# Altium PCB TM7705dayin.PcbDoc (part 2 of 2)
Units mm, origin at the board's own origin, x right, y up, seen from the top; angles counter-clockwise.
Board outline 80.01 x 33.4 mm, 2 copper layers (Top Layer, Bottom Layer); 118 components, 26 nets, 462 pads, 0 vias.
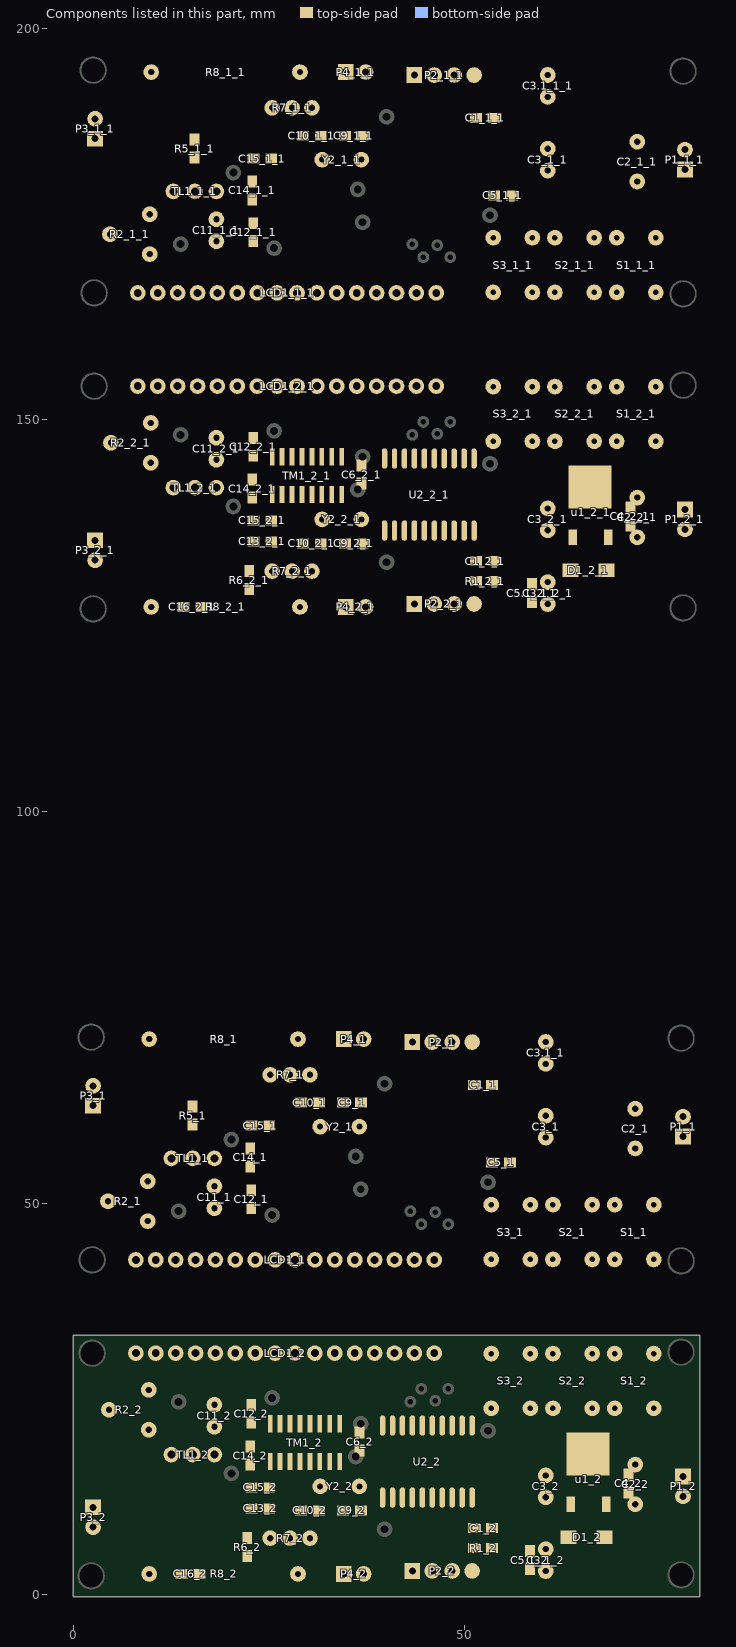
[diagram p2: the components of this part, seen from the top]

## Nets (pads, with @x,y where several pads share a name; then routed paths per layer and width w, separated by ;. In a path a pad name is that pad's centre, name@x,y a point inside that pad or via, vN(x,y) a via of type N, cw(c..) or ccw(c..) an arc to the next point about the centre after c; other vN are vias at no path point) (continued)
copper on no net: | length 3457.9
  Top Layer w0.7: 3.937,23.495 3.937,27.432 4.445,27.94 ; 4.191,146.939 4.191,150.876 4.699,151.384 ; 4.445,23.368 4.445,27.94 ; 4.699,146.812 4.699,151.384 ; 5.08,24.003 5.08,28.258 ; 5.334,147.447 5.334,151.701 ; 6.604,14.351 9.779,14.351 ; 6.858,137.795 10.033,137.795 ; 7.239,27.305 8.128,28.194 8.636,28.194 8.636,28.067 6.858,26.289 ; 7.493,150.749 8.382,151.638 8.89,151.638 8.89,151.511 7.112,149.733 ; 8.001,30.861 8.001,28.829 6.858,27.686 6.858,26.289 ; 8.255,154.305 8.255,152.273 7.112,151.13 7.112,149.733 ; 12.534,17.907 12.534,17.692 ; 12.788,141.351 12.788,141.136 ; 13.081,30.861 13.081,31.877 12.319,32.639 ; 13.335,154.305 13.335,155.321 12.573,156.083 ; 14.097,4.318 14.097,9.398 ; 14.351,127.762 14.351,132.842 ; 15.494,17.907 15.284,17.907 ; 15.621,42.759 15.621,44.537 17.526,46.442 30.734,46.442 33.274,48.982 43.053,48.982 ; 15.748,141.351 15.538,141.351 ; 15.875,166.203 15.875,167.981 17.78,169.886 30.988,169.886 33.528,172.426 43.307,172.426 ; 16.129,2.667 16.129,4.953 22.225,11.049 22.733,11.049 22.733,13.716 22.733,16.256 ; 16.383,126.111 16.383,128.397 22.479,134.493 22.987,134.493 22.987,137.16 22.987,139.7 ; 16.764,2.413 24.765,2.413 27.559,5.207 ; 17.018,125.857 25.019,125.857 27.813,128.651 ; 18.034,17.907 18.034,17.018 16.891,15.875 ; 18.034,21.463 18.542,21.971 ; 18.161,14.224 18.288,14.351 ; 18.161,27.686 18.161,28.194 ; 18.161,30.861 18.161,28.194 ; 18.288,141.351 18.288,140.462 17.145,139.319 ; 18.288,144.907 18.796,145.415 ; 18.415,16.891 17.399,15.875 ; 18.415,137.668 18.542,137.795 ; 18.415,151.13 18.415,151.638 ; 18.415,154.305 18.415,151.638 ; 18.669,140.335 17.653,139.319 ; 20.701,42.759 20.701,43.775 22.098,45.172 ; 20.955,45.172 22.098,45.172 ; 20.955,166.203 20.955,167.219 22.352,168.616 ; 21.209,168.616 22.352,168.616 ; 22.098,7.366 25.019,10.287 ; 22.352,130.81 25.273,133.731 ; 22.479,5.207 27.559,5.207 ; 22.733,128.651 27.813,128.651 ; 25.146,21.831 25.006,21.971 24.13,21.971 ; 25.273,13.335 26.416,14.478 ; 25.4,145.275 25.26,145.415 24.384,145.415 ; 25.527,136.779 26.67,137.922 ; 26.416,17.031 26.416,15.24 ; 26.67,140.475 26.67,138.684 ; 27.686,17.031 27.686,18.415 27.178,18.923 25.654,18.923 25.146,18.415 25.146,17.031 24.752,16.637 22.606,16.637 22.352,16.383 22.225,16.383 22.225,14.478 16.002,8.255 16.002,1.27 16.383,0.889 34.925,0.889 35.179,1.143 35.179,5.207 27.559,5.207 ; 27.94,140.475 27.94,141.859 27.432,142.367 25.908,142.367 25.4,141.859 25.4,140.475 25.006,140.081 22.86,140.081 22.606,139.827 22.479,139.827 22.479,137.922 16.256,131.699 16.256,124.714 16.637,124.333 35.179,124.333 35.433,124.587 35.433,128.651 27.813,128.651 ; 28.829,10.668 28.829,11.938 31.496,14.605 ; 28.956,17.031 28.956,18.669 29.718,19.431 31.623,19.431 32.766,20.574 32.766,21.831 32.766,23.368 33.274,23.876 34.671,23.876 ; 28.956,21.831 28.956,24.384 31.877,27.305 37.973,27.305 41.957,23.321 41.957,21.698 42.037,21.618 ; 28.996,10.882 29.083,10.795 29.464,11.176 29.464,11.811 31.496,13.843 31.536,13.843 ; 29.083,134.112 29.083,135.382 31.75,138.049 ; 29.21,140.475 29.21,142.113 29.972,142.875 31.877,142.875 33.02,144.018 33.02,145.275 33.02,146.812 33.528,147.32 34.925,147.32 ; 29.21,145.275 29.21,147.828 32.131,150.749 38.227,150.749 42.211,146.765 42.211,145.142 42.291,145.062 ; 29.25,134.326 29.337,134.239 29.718,134.62 29.718,135.255 31.75,137.287 31.79,137.287 ; 30.226,7.239 30.607,7.62 35.433,7.62 36.068,6.985 ; 30.226,17.031 30.226,15.113 27.432,12.319 27.432,9.906 28.194,9.144 32.385,9.144 ; 30.226,21.831 30.226,24.003 32.385,26.162 37.465,26.162 40.767,22.86 40.767,21.618 ; 30.353,6.477 35.941,6.477 ; 30.48,6.985 35.433,6.985 ; 30.48,130.683 30.861,131.064 35.687,131.064 36.322,130.429 ; 30.48,140.475 30.48,138.557 27.686,135.763 27.686,133.35 28.448,132.588 32.639,132.588 ; 30.48,145.275 30.48,147.447 32.639,149.606 37.719,149.606 41.021,146.304 41.021,145.062 ; 30.607,129.921 36.195,129.921 ; 30.734,130.429 35.687,130.429 ; 31.496,13.93 31.496,14.605 ; 31.496,15.24 31.496,14.605 ; 31.496,17.031 31.496,14.605 ; 31.496,21.831 31.496,23.749 32.766,25.019 36.322,25.019 39.497,21.844 39.497,21.618 ; 31.75,137.374 31.75,138.049 ; 31.75,138.684 31.75,138.049 ; 31.75,140.475 31.75,138.049 ; 31.75,145.275 31.75,147.193 33.02,148.463 36.576,148.463 39.751,145.288 39.751,145.062 ; 32.766,17.031 32.766,15.621 34.163,14.224 ; 33.02,140.475 33.02,139.065 34.417,137.668 ; 33.401,42.759 33.401,44.41 34.671,45.68 45.212,45.68 45.931,46.399 45.931,49.152 46.228,48.855 ; 33.655,166.203 33.655,167.854 34.925,169.124 45.466,169.124 46.185,169.843 46.185,172.596 46.482,172.299 ; 34.036,17.031 34.036,16.51 34.925,15.621 40.005,15.621 40.767,14.859 40.767,12.418 ; 34.036,20.701 34.036,20.32 ; 34.036,22.225 34.036,21.831 34.036,20.32 ; 34.29,140.475 34.29,139.954 35.179,139.065 40.259,139.065 41.021,138.303 41.021,135.862 ; 34.29,144.145 34.29,143.764 ; 34.29,145.669 34.29,145.275 34.29,143.764 ; 34.798,9.779 35.433,9.144 ; 35.052,133.223 35.687,132.588 ; 35.56,9.144 35.433,9.144 ; 35.814,132.588 35.687,132.588 ; 35.941,42.759 35.941,43.394 37.084,44.537 46.609,44.537 47.879,45.807 47.879,47.331 ; 36.155,13.462 34.925,13.462 34.544,13.843 ; 36.155,14.224 34.163,14.224 ; 36.195,166.203 36.195,166.838 37.338,167.981 46.863,167.981 48.133,169.251 48.133,170.775 ; 36.409,136.906 35.179,136.906 34.798,137.287 ; 36.409,137.668 34.417,137.668 ; 36.449,3.048 36.449,5.969 ; 36.449,10.795 36.703,10.795 36.703,13.676 ; 36.536,13.843 34.544,13.843 ; 36.576,20.701 36.068,20.701 35.814,20.955 35.814,22.733 34.671,23.876 ; 36.703,17.653 36.068,17.653 35.433,18.288 ; 36.703,21.844 36.703,22.098 ; 36.703,126.492 36.703,129.413 ; 36.703,134.239 36.957,134.239 36.957,137.12 ; 36.79,137.287 34.798,137.287 ; 36.83,18.796 35.56,18.796 34.036,20.32 ; 36.83,144.145 36.322,144.145 36.068,144.399 36.068,146.177 34.925,147.32 ; 36.957,2.413 36.957,5.461 36.449,5.969 ; 36.957,141.097 36.322,141.097 35.687,141.732 ; 36.957,145.288 36.957,145.542 ; 37.084,142.24 35.814,142.24 34.29,143.764 ; 37.211,125.857 37.211,128.905 36.703,129.413 ; 37.338,18.796 37.338,16.891 37.084,16.637 35.941,16.637 35.433,17.145 35.433,18.288 ; 37.592,2.921 37.592,5.461 36.068,6.985 ; 37.592,142.24 37.592,140.335 37.338,140.081 36.195,140.081 35.687,140.589 35.687,141.732 ; 37.846,126.365 37.846,128.905 36.322,130.429 ; 38.1,8.763 35.941,8.763 ; 38.354,132.207 36.195,132.207 ; 38.735,30.861 38.735,29.21 40.132,27.813 48.895,27.813 49.784,26.924 49.784,24.511 48.387,23.114 48.387,21.618 ; 38.989,154.305 38.989,152.654 40.386,151.257 49.149,151.257 50.038,150.368 50.038,147.955 48.641,146.558 48.641,145.062 ; 39.497,12.418 39.497,10.795 ; 39.751,135.862 39.751,134.239 ; 41.021,30.861 41.021,30.226 42.164,29.083 49.53,29.083 51.054,27.559 51.054,24.257 49.657,22.86 49.657,21.618 ; 41.275,154.305 41.275,153.67 42.418,152.527 49.784,152.527 51.308,151.003 51.308,147.701 49.911,146.304 49.911,145.062 ; 42.037,12.418 42.037,17.272 43.561,18.796 53.467,18.796 58.38,23.709 ; 42.291,135.862 42.291,140.716 43.815,142.24 53.721,142.24 58.634,147.153 ; 43.307,3.048 43.307,6.985 ; 43.307,12.418 43.307,16.002 44.577,17.272 54.991,17.272 61.254,23.535 ; 43.307,21.618 43.307,24.384 ; 43.561,42.759 43.561,42.378 44.989,40.95 ; 43.561,126.492 43.561,130.429 ; 43.561,135.862 43.561,139.446 44.831,140.716 55.245,140.716 61.508,146.979 ; 43.561,145.062 43.561,147.828 ; 43.815,166.203 43.815,165.822 45.243,164.394 ; 43.942,40.95 44.989,40.95 ; 44.196,164.394 45.243,164.394 ; 44.45,47.331 33.782,47.331 31.623,45.172 22.098,45.172 ; 44.577,12.418 44.577,14.605 45.72,15.748 56.515,15.748 63.627,22.86 63.627,24.257 65.786,26.416 69.977,26.416 ; 44.577,21.618 44.577,26.162 ; 44.704,170.775 34.036,170.775 31.877,168.616 22.352,168.616 ; 44.831,135.862 44.831,138.049 45.974,139.192 56.769,139.192 63.881,146.304 63.881,147.701 66.04,149.86 70.231,149.86 ; 44.831,145.062 44.831,149.606 ; 45.593,30.226 51.943,30.226 ; 45.847,21.618 45.847,24.384 ; 45.847,153.67 52.197,153.67 ; 46.101,30.861 51.308,30.861 ; 46.101,145.062 46.101,147.828 ; 46.355,154.305 51.562,154.305 ; 46.609,31.496 47.879,31.496 49.022,32.639 ; 46.609,32.639 49.022,32.639 ; 46.863,154.94 48.133,154.94 49.276,156.083 ; 46.863,156.083 49.276,156.083 ; 47.117,21.618 47.201,21.702 47.201,23.452 47.879,24.13 47.879,26.289 ; 47.371,145.062 47.455,145.146 47.455,146.896 48.133,147.574 48.133,149.733 ; 48.387,12.418 48.387,9.906 46.291,7.81 ; 48.641,135.862 48.641,133.35 46.545,131.255 ; 48.895,3.556 48.895,8.763 ; 49.149,127 49.149,132.207 ; 49.657,12.418 49.657,9.525 48.895,8.763 ; 49.911,135.862 49.911,132.969 49.149,132.207 ; 50.8,55.205 50.038,54.443 50.038,43.394 47.594,40.95 44.989,40.95 ; 50.927,12.418 50.927,6.223 51.181,5.969 ; 50.927,21.618 52.296,21.618 52.959,20.955 ; 51.054,178.649 50.292,177.887 50.292,166.838 47.848,164.394 45.243,164.394 ; 51.181,135.862 51.181,129.667 51.435,129.413 ; 51.181,145.062 52.55,145.062 53.213,144.399 ; 53.086,8.255 55.118,8.255 58.039,5.334 63.119,5.334 64.008,6.223 ; 53.34,131.699 55.372,131.699 58.293,128.778 63.373,128.778 64.262,129.667 ; 55.816,3.619 53.467,5.969 53.086,5.588 53.086,2.413 51.816,1.143 44.673,1.143 43.942,1.874 43.942,6.35 43.307,6.985 ; 56.07,127.063 53.721,129.413 53.34,129.032 53.34,125.857 52.07,124.587 44.927,124.587 44.196,125.318 44.196,129.794 43.561,130.429 ; 57.277,12.192 57.277,11.938 57.658,11.557 63.019,11.557 ; 57.531,7.366 59.817,7.366 63.232,10.781 ; 57.531,135.636 57.531,135.382 57.912,135.001 63.273,135.001 ; 57.785,130.81 60.071,130.81 63.486,134.225 ; 58.42,6.35 62.216,6.35 63.232,7.366 63.232,10.781 ; 58.674,129.794 62.47,129.794 63.486,130.81 63.486,134.225 ; 63.246,3.683 63.5,3.683 64.135,4.318 ; 63.5,127.127 63.754,127.127 64.389,127.762 ; 63.627,3.683 64.135,4.191 64.135,4.318 ; 63.881,127.127 64.389,127.635 64.389,127.762 ; 65.745,23.296 66.254,23.805 ; 65.999,146.74 66.508,147.249 ; 66.254,18.466 69.128,21.34 69.128,23.805 ; 66.254,30.805 66.254,32.472 ; 66.508,141.91 69.382,144.784 69.382,147.249 ; 66.508,154.249 66.508,155.916 ; 67.945,7.479 67.945,11.557 69.469,13.081 77.343,13.081 77.851,12.573 ; 68.199,130.923 68.199,135.001 69.723,136.525 77.597,136.525 78.105,136.017 ; 69.001,30.678 69.001,31.71 68.072,32.639 ; 69.128,30.805 69.652,30.805 72.517,27.94 ; 69.255,154.122 69.255,155.154 68.326,156.083 ; 69.382,154.249 69.906,154.249 72.771,151.384 ; 73.66,25.527 72.898,26.289 72.898,26.416 ; 73.914,25.273 74.128,25.059 74.128,24.551 ; 73.914,148.971 73.152,149.733 73.152,149.86 ; 74.128,23.805 74.128,24.551 ; 74.168,148.717 74.382,148.503 74.382,147.995 ; 74.382,147.249 74.382,147.995 ; 77.851,15.113 68.199,15.113 ; 78.105,138.557 68.453,138.557 ; 78.359,20.701 78.359,23.622 74.041,27.94 ; 78.613,144.145 78.613,147.066 74.295,151.384 ; 4.445,27.94 5.08,28.575 ; 4.445,27.94 4.445,27.813 4.889,28.258 5.08,28.258 ; 4.699,151.384 4.699,151.257 5.143,151.701 5.334,151.701 ; 4.699,151.384 5.334,152.019 ; 5.08,28.258 5.08,28.575 ; 5.08,28.575 5.588,29.083 5.588,32.004 6.223,32.639 12.319,32.639 ; 5.334,151.701 5.334,152.019 ; 5.334,152.019 5.842,152.527 5.842,155.448 6.477,156.083 12.573,156.083 ; 6.858,22.098 6.858,20.955 8.255,19.558 13.462,19.558 15.113,17.907 15.284,17.907 ; 6.858,22.098 7.683,22.924 ; 6.858,22.098 6.858,23.749 ; 6.858,23.749 6.858,24.511 ; 6.858,23.749 7.683,22.924 ; 6.858,24.511 6.858,26.289 ; 6.858,24.511 7.874,23.495 8.255,23.495 ; 7.112,145.542 7.112,147.193 ; 7.112,145.542 7.938,146.368 ; 7.112,145.542 7.112,144.399 8.509,143.002 13.716,143.002 15.367,141.351 15.538,141.351 ; 7.112,147.193 7.938,146.368 ; 7.112,147.193 7.112,147.955 ; 7.112,147.955 8.128,146.939 8.509,146.939 ; 7.112,147.955 7.112,149.733 ; 7.683,22.924 8.255,23.495 ; 7.938,146.368 8.509,146.939 ; 8.255,23.495 11.176,23.495 15.875,28.194 18.161,28.194 ; 8.509,146.939 11.43,146.939 16.129,151.638 18.415,151.638 ; 9.779,14.351 14.097,10.033 14.097,9.398 ; 9.779,14.351 18.288,14.351 ; 10.033,137.795 18.542,137.795 ; 10.033,137.795 14.351,133.477 14.351,132.842 ; 12.319,32.639 13.081,32.639 ; 12.534,17.692 12.534,17.057 13.716,15.875 14.351,15.875 ; 12.534,17.692 14.351,15.875 ; 12.573,156.083 13.335,156.083 ; 12.788,141.136 14.605,139.319 ; 12.788,141.136 12.788,140.501 13.97,139.319 14.605,139.319 ; 13.081,32.639 13.335,32.639 13.716,32.258 13.716,31.877 13.081,32.512 13.081,32.639 ; 13.335,156.083 13.335,155.956 13.97,155.321 13.97,155.702 13.589,156.083 13.335,156.083 ; 14.097,9.398 20.701,16.002 20.701,17.653 21.971,18.923 22.606,18.923 23.749,20.066 ; 14.351,15.875 16.129,15.875 ; 14.351,132.842 20.955,139.446 20.955,141.097 22.225,142.367 22.86,142.367 24.003,143.51 ; 14.605,139.319 16.383,139.319 ; 15.284,17.907 15.284,19.685 15.284,23.031 16.516,24.263 18.034,24.263 18.04,24.257 22.733,24.257 26.289,24.257 ; 15.538,141.351 15.538,143.129 15.538,146.475 16.77,147.707 18.288,147.707 18.294,147.701 22.987,147.701 26.543,147.701 ; 16.129,15.875 17.145,16.891 17.145,21.59 17.526,21.971 18.542,21.971 ; 16.129,15.875 16.891,15.875 ; 16.383,139.319 17.145,139.319 ; 16.383,139.319 17.399,140.335 17.399,145.034 17.78,145.415 18.796,145.415 ; 16.891,15.875 17.399,15.875 ; 17.145,139.319 17.653,139.319 ; 17.399,15.875 17.907,15.875 19.177,17.145 19.177,20.574 19.812,21.209 23.495,21.209 23.495,21.336 24.13,21.971 ; 17.653,139.319 18.161,139.319 19.431,140.589 19.431,144.018 20.066,144.653 23.749,144.653 23.749,144.78 24.384,145.415 ; 18.161,28.194 27.432,28.194 27.686,27.94 27.686,23.876 ; 18.288,14.351 20.574,16.637 20.574,19.304 21.336,20.066 23.749,20.066 ; 18.415,151.638 27.686,151.638 27.94,151.384 27.94,147.32 ; 18.542,21.971 22.733,21.971 24.13,21.971 ; 18.542,137.795 20.828,140.081 20.828,142.748 21.59,143.51 24.003,143.51 ; 18.796,145.415 22.987,145.415 24.384,145.415 ; 23.749,20.066 25.781,20.066 ; 24.003,143.51 26.035,143.51 ; 25.019,10.287 25.019,11.049 25.019,13.716 25.019,13.843 26.416,15.24 ; 25.019,10.287 25.019,9.144 23.114,7.239 25.146,7.239 27.686,7.239 27.686,8.001 25.654,10.033 25.654,13.716 26.416,14.478 ; 25.273,133.731 25.273,132.588 23.368,130.683 25.4,130.683 27.94,130.683 27.94,131.445 25.908,133.477 25.908,137.16 26.67,137.922 ; 25.273,133.731 25.273,134.493 25.273,137.16 25.273,137.287 26.67,138.684 ; 25.781,20.066 26.416,20.701 ; 25.781,20.066 27.051,20.066 ; 26.035,143.51 27.305,143.51 ; 26.035,143.51 26.67,144.145 ; 26.289,24.257 27.305,24.257 27.686,23.876 ; 26.289,24.257 26.416,24.13 26.416,21.831 26.416,20.701 ; 26.416,14.478 26.416,15.24 ; 26.416,20.701 27.051,20.066 ; 26.543,147.701 26.67,147.574 26.67,145.275 26.67,144.145 ; 26.543,147.701 27.559,147.701 27.94,147.32 ; 26.67,137.922 26.67,138.684 ; 26.67,144.145 27.305,143.51 ; 27.051,20.066 27.432,20.066 27.686,20.32 27.686,21.831 27.686,23.876 ; 27.305,143.51 27.686,143.51 27.94,143.764 27.94,145.275 27.94,147.32 ; 34.036,20.32 34.036,19.431 34.29,19.431 35.433,18.288 ; 34.163,14.224 34.544,13.843 ; 34.29,143.764 34.29,142.875 34.544,142.875 35.687,141.732 ; 34.417,137.668 34.798,137.287 ; 34.671,23.876 34.925,23.876 ; 34.925,9.144 34.417,9.652 34.417,10.795 31.369,10.795 31.369,9.779 32.385,8.763 35.306,8.763 ; 34.925,9.144 35.306,8.763 ; 34.925,9.144 35.433,9.144 ; 34.925,23.876 36.703,22.098 ; 34.925,23.876 35.433,23.876 36.703,22.606 36.703,22.098 ; 34.925,147.32 35.179,147.32 ; 35.179,132.588 35.687,132.588 ; 35.179,132.588 35.56,132.207 ; 35.179,132.588 34.671,133.096 34.671,134.239 31.623,134.239 31.623,133.223 32.639,132.207 35.56,132.207 ; 35.179,147.32 35.687,147.32 36.957,146.05 36.957,145.542 ; 35.179,147.32 36.957,145.542 ; 35.306,8.763 35.941,8.763 ; 35.433,6.985 36.068,6.985 ; 35.433,6.985 35.941,6.477 ; 35.433,9.144 36.322,9.144 ; 35.56,132.207 36.195,132.207 ; 35.687,130.429 36.195,129.921 ; 35.687,130.429 36.322,130.429 ; 35.687,132.588 36.576,132.588 ; 35.941,6.477 36.449,5.969 ; 35.941,8.763 39.243,5.461 39.243,1.27 39.782,0.731 64.358,0.731 65.977,2.349 65.977,12.89 ; 35.941,8.763 36.322,9.144 ; 36.195,129.921 36.703,129.413 ; 36.195,132.207 36.576,132.588 ; 36.195,132.207 39.497,128.905 39.497,124.714 40.036,124.175 64.612,124.175 66.23,125.793 66.23,136.334 ; 36.322,9.144 38.481,9.144 39.497,10.16 39.497,10.795 ; 36.576,132.588 38.735,132.588 39.751,133.604 39.751,134.239 ; 39.497,10.795 43.307,6.985 ; 39.751,134.239 43.561,130.429 ; 45.847,3.048 45.847,7.366 ; 45.847,3.048 46.291,3.492 46.291,7.81 ; 45.847,3.048 45.339,3.556 45.339,6.858 45.847,7.366 ; 45.847,7.366 46.291,7.81 ; 46.101,126.492 45.593,127 45.593,130.302 46.101,130.81 ; 46.101,126.492 46.545,126.936 46.545,131.255 ; 46.101,126.492 46.101,130.81 ; 46.101,130.81 46.545,131.255 ; 48.387,8.255 48.387,3.048 47.879,3.556 47.879,7.747 48.387,8.255 ; 48.387,8.255 48.895,8.763 ; 48.641,131.699 48.133,131.191 48.133,127 48.641,126.492 48.641,131.699 ; 48.641,131.699 49.149,132.207 ; 49.022,32.639 54.864,32.639 ; 49.276,156.083 55.118,156.083 ; 51.308,30.861 53.324,30.861 53.38,30.805 53.38,31.155 54.864,32.639 ; 51.308,30.861 51.943,30.226 ; 51.562,154.305 52.197,153.67 ; 51.562,154.305 53.578,154.305 53.634,154.249 53.634,154.599 55.118,156.083 ; 51.943,30.226 52.705,29.464 54.483,29.464 57.658,32.639 ; 52.197,153.67 52.959,152.908 54.737,152.908 57.912,156.083 ; 54.864,32.639 57.658,32.639 ; 55.118,156.083 57.912,156.083 ; 57.658,32.639 62.738,32.639 ; 57.912,156.083 62.992,156.083 ; 61.622,12.954 63.5,12.954 64.008,12.446 64.008,6.223 ; 61.622,12.954 63.019,11.557 ; 61.622,12.954 56.388,12.954 53.467,10.033 53.467,8.509 55.626,8.509 57.912,6.223 64.008,6.223 ; 61.876,136.398 56.642,136.398 53.721,133.477 53.721,131.953 55.88,131.953 58.166,129.667 64.262,129.667 ; 61.876,136.398 63.273,135.001 ; 61.876,136.398 63.754,136.398 64.262,135.89 64.262,129.667 ; 62.738,32.639 68.072,32.639 ; 62.738,32.639 67.437,27.94 72.517,27.94 ; 62.992,156.083 67.691,151.384 72.771,151.384 ; 62.992,156.083 68.326,156.083 ; 63.019,11.557 63.445,11.557 63.445,10.994 63.232,10.781 ; 63.019,11.557 63.232,11.344 63.232,10.781 ; 63.273,135.001 63.486,134.788 63.486,134.225 ; 63.273,135.001 63.699,135.001 63.699,134.438 63.486,134.225 ; 64.135,4.318 65.151,5.334 65.151,12.065 ; 64.389,127.762 65.405,128.778 65.405,135.509 ; 65.151,12.065 65.405,12.319 ; 65.151,12.065 65.151,13.081 ; 65.151,13.081 65.151,15.113 ; 65.151,13.081 63.119,15.113 65.151,15.113 ; 65.151,13.081 65.405,12.827 65.405,12.319 ; 65.151,15.113 68.199,15.113 ; 65.405,12.319 65.977,12.89 ; 65.405,135.509 65.405,136.525 ; 65.405,135.509 65.659,135.763 ; 65.405,136.525 65.659,136.271 65.659,135.763 ; 65.405,136.525 63.373,138.557 65.405,138.557 ; 65.405,136.525 65.405,138.557 ; 65.405,138.557 68.453,138.557 ; 65.659,135.763 66.23,136.334 ; 65.977,12.89 68.199,15.113 ; 66.23,136.334 68.453,138.557 ; 68.072,32.639 69.342,32.639 74.041,27.94 ; 68.326,156.083 69.596,156.083 74.295,151.384 ; 69.977,26.416 72.263,26.416 ; 69.977,26.416 73.66,22.733 75.311,22.733 75.692,23.114 75.692,24.003 73.279,26.416 72.898,26.416 ; 70.231,149.86 73.914,146.177 75.565,146.177 75.946,146.558 75.946,147.447 73.533,149.86 73.152,149.86 ; 70.231,149.86 72.517,149.86 ; 72.263,26.416 74.128,24.551 ; 72.263,26.416 72.898,26.416 ; 72.517,27.94 74.041,27.94 ; 72.517,149.86 73.152,149.86 ; 72.517,149.86 74.382,147.995 ; 72.771,151.384 74.295,151.384
  Top Layer w1.5: 10.541,42.759 10.541,46.696 9.525,47.712 7.112,50.125 7.112,56.602 ; 10.795,166.203 10.795,170.14 9.779,171.156 7.366,173.569 7.366,180.046 ; 12.534,55.713 12.534,57.833 14.732,60.031 15.24,60.031 16.002,60.031 18.034,57.999 18.034,55.713 18.034,52.157 ; 12.788,179.157 12.788,181.277 14.986,183.475 15.494,183.475 16.256,183.475 18.288,181.443 18.288,179.157 18.288,175.601 ; 19.431,64.857 21.78,67.207 ; 19.685,188.301 22.034,190.651 ; 21.082,66.381 17.018,62.317 ; 21.336,189.825 17.272,185.761 ; 60.325,67.778 57.912,67.778 ; 60.579,191.222 58.166,191.222 ; 7.112,56.602 7.112,57.999 ; 7.112,56.602 12.827,62.317 ; 7.112,57.999 7.112,59.396 ; 7.112,57.999 11.43,62.317 12.827,62.317 ; 7.112,59.396 7.112,62.444 13.208,68.54 21.463,68.54 ; 7.112,59.396 11.303,63.587 16.51,63.587 ; 7.366,180.046 13.081,185.761 ; 7.366,180.046 7.366,181.443 ; 7.366,181.443 11.684,185.761 13.081,185.761 ; 7.366,181.443 7.366,182.84 ; 7.366,182.84 11.557,187.031 16.764,187.031 ; 7.366,182.84 7.366,185.888 13.462,191.984 21.717,191.984 ; 12.827,62.317 15.24,62.317 ; 13.081,185.761 15.494,185.761 ; 15.24,62.317 17.018,62.317 ; 15.24,62.317 16.51,63.587 ; 15.494,185.761 16.764,187.031 ; 15.494,185.761 17.272,185.761 ; 16.51,63.587 21.463,68.54 ; 16.764,187.031 21.717,191.984 ; 17.018,62.317 19.05,62.317 21.78,65.048 21.78,67.207 ; 17.272,185.761 19.304,185.761 22.034,188.492 22.034,190.651 ; 21.463,68.54 23.114,68.54 ; 21.717,191.984 23.368,191.984 ; 21.78,67.207 23.114,68.54 ; 22.034,190.651 23.368,191.984 ; 23.114,68.54 32.766,68.54 ; 23.368,191.984 33.02,191.984 ; 32.766,68.54 57.15,68.54 57.912,67.778 ; 32.766,68.54 33.528,67.778 57.912,67.778 ; 33.02,191.984 33.782,191.222 58.166,191.222 ; 33.02,191.984 57.404,191.984 58.166,191.222
  Top Layer w2: 15.284,48.43 15.284,51.141 ; 15.284,55.713 15.284,54.189 ; 15.538,171.874 15.538,174.585 ; 15.538,179.157 15.538,177.633 ; 24.32,60.793 25.59,62.063 ; 24.575,184.237 25.845,185.507 ; 27.432,51.268 28.194,52.03 ; 27.686,174.712 28.448,175.474 ; 36.703,51.776 47.498,51.776 52.959,57.237 ; 36.957,175.22 47.752,175.22 53.213,180.681 ; 40.386,61.047 39.243,61.047 ; 40.64,184.491 39.497,184.491 ; 52.959,52.665 52.959,57.237 ; 53.213,176.109 53.213,180.681 ; 60.325,61.174 56.896,61.174 52.959,57.237 ; 60.579,184.618 57.15,184.618 53.213,180.681 ; 61.722,17.018 64.806,17.018 63.536,15.748 60.827,15.748 60.325,15.246 60.325,16.256 66.254,22.185 66.254,23.805 69.128,23.805 72.486,20.447 73.279,20.447 ; 61.976,140.462 65.06,140.462 63.79,139.192 61.081,139.192 60.579,138.69 60.579,139.7 66.508,145.629 66.508,147.249 69.382,147.249 72.74,143.891 73.533,143.891 ; 63.016,54.848 62.531,55.332 ; 63.27,178.292 62.785,178.776 ; 15.284,51.141 15.284,54.189 ; 15.284,51.141 17.068,49.357 18.034,49.357 19.171,49.357 20.955,51.141 20.955,59.777 24.956,63.778 27.305,63.778 ; 15.284,54.189 14.014,52.919 9.652,52.919 9.525,52.792 9.525,52.538 13.716,48.347 22.86,48.347 ; 15.538,174.585 17.322,172.801 18.288,172.801 19.425,172.801 21.209,174.585 21.209,183.221 25.209,187.222 27.559,187.222 ; 15.538,174.585 15.538,177.633 ; 15.538,177.633 14.268,176.363 9.906,176.363 9.779,176.236 9.779,175.982 13.97,171.791 23.114,171.791 ; 22.86,48.347 27.051,48.347 ; 22.86,48.347 25.59,51.078 25.59,62.063 ; 23.114,171.791 25.845,174.522 25.845,185.507 ; 23.114,171.791 27.305,171.791 ; 25.59,62.063 27.305,63.778 ; 25.845,185.507 27.559,187.222 ; 27.051,48.347 29.21,48.347 32.131,51.268 ; 27.051,48.347 29.972,51.268 31.242,51.268 ; 27.305,63.778 32.131,63.778 ; 27.305,171.791 30.226,174.712 31.496,174.712 ; 27.305,171.791 29.464,171.791 32.385,174.712 ; 27.559,187.222 32.385,187.222 ; 28.194,52.03 29.337,52.03 34.163,56.856 ; 28.194,52.03 28.194,58.253 ; 28.194,58.253 28.194,61.047 29.591,62.444 37.846,62.444 ; 28.194,58.253 29.591,56.856 34.163,56.856 ; 28.448,175.474 28.448,181.697 ; 28.448,175.474 29.591,175.474 34.417,180.3 ; 28.448,181.697 29.845,180.3 34.417,180.3 ; 28.448,181.697 28.448,184.491 29.845,185.888 38.1,185.888 ; 31.242,51.268 32.131,51.268 ; 31.242,51.268 35.242,55.269 ; 31.496,174.712 35.496,178.713 ; 31.496,174.712 32.385,174.712 ; 32.131,51.268 35.687,54.824 45.974,54.824 54.927,63.778 ; 32.131,63.778 43.116,63.778 ; 32.131,63.778 33.846,65.492 53.975,65.492 ; 32.385,174.712 35.941,178.268 46.228,178.268 55.181,187.222 ; 32.385,187.222 34.099,188.936 54.229,188.936 ; 32.385,187.222 43.37,187.222 ; 34.163,56.856 36.83,56.856 ; 34.417,180.3 37.084,180.3 ; 35.242,55.269 36.83,56.856 ; 35.242,55.269 35.623,54.888 37.592,56.856 ; 35.496,178.713 35.877,178.332 37.846,180.3 ; 35.496,178.713 37.084,180.3 ; 36.83,56.856 37.592,56.856 ; 37.084,180.3 37.846,180.3 ; 37.592,56.856 39.243,58.507 ; 37.846,62.444 41.783,62.444 43.116,63.778 ; 37.846,62.444 39.243,61.047 ; 37.846,180.3 39.497,181.951 ; 38.1,185.888 39.497,184.491 ; 38.1,185.888 42.037,185.888 43.37,187.222 ; 39.243,58.507 44.514,63.778 ; 39.243,58.507 39.243,61.047 ; 39.497,181.951 39.497,184.491 ; 39.497,181.951 44.767,187.222 ; 43.116,63.778 44.514,63.778 ; 43.37,187.222 44.767,187.222 ; 44.514,63.778 54.927,63.778 ; 44.767,187.222 55.181,187.222 ; 53.975,65.492 62.611,65.492 ; 53.975,65.492 55.689,63.778 ; 54.229,188.936 55.944,187.222 ; 54.229,188.936 62.865,188.936 ; 54.927,63.778 55.689,63.778 ; 55.181,187.222 55.944,187.222 ; 55.689,63.778 61.658,63.778 ; 55.944,187.222 61.912,187.222 ; 56.896,56.475 58.795,58.374 60.325,58.374 ; 56.896,56.475 55.753,55.332 62.531,55.332 ; 56.896,56.475 59.262,56.475 60.325,57.538 ; 57.15,179.919 59.516,179.919 60.579,180.982 ; 57.15,179.919 56.007,178.776 62.785,178.776 ; 57.15,179.919 59.049,181.818 60.579,181.818 ; 60.325,57.538 62.531,55.332 ; 60.325,57.538 60.325,58.374 ; 60.325,58.374 61.843,58.374 ; 60.579,180.982 60.579,181.818 ; 60.579,180.982 62.785,178.776 ; 60.579,181.818 62.097,181.818 ; 61.658,63.778 65.278,63.778 ; 61.658,63.778 63.119,62.317 63.119,59.65 61.843,58.374 ; 61.843,58.374 62.859,58.374 65.278,60.793 ; 61.912,187.222 63.373,185.761 63.373,183.094 62.097,181.818 ; 61.912,187.222 65.532,187.222 ; 62.097,181.818 63.113,181.818 65.532,184.237 ; 62.531,55.332 66.254,51.609 66.254,49.815 69.032,49.815 72.517,53.3 77.597,53.3 77.978,53.681 77.978,57.872 67.818,57.872 65.278,60.412 65.278,60.793 ; 62.605,70.578 63.24,70.578 65.278,68.54 ; 62.605,70.578 63.627,69.556 63.627,66.508 62.611,65.492 ; 62.605,70.578 60.325,70.578 60.325,72.08 60.468,72.223 64.135,72.223 65.278,71.08 65.278,68.54 ; 62.611,65.492 65.151,65.492 65.278,65.365 ; 62.785,178.776 66.508,175.053 66.508,173.259 69.286,173.259 72.771,176.744 77.851,176.744 78.232,177.125 78.232,181.316 68.072,181.316 65.532,183.856 65.532,184.237 ; 62.859,194.022 60.579,194.022 60.579,195.524 60.722,195.667 64.389,195.667 65.532,194.524 65.532,191.984 ; 62.859,194.022 63.881,193 63.881,189.952 62.865,188.936 ; 62.859,194.022 63.494,194.022 65.532,191.984 ; 62.865,188.936 65.405,188.936 65.532,188.809 ; 65.278,60.793 65.278,63.778 ; 65.278,63.778 65.278,65.365 ; 65.278,65.365 65.278,68.54 ; 65.532,184.237 65.532,187.222 ; 65.532,187.222 65.532,188.809 ; 65.532,188.809 65.532,191.984

## Keep-outs
Keep-Out Layer:
  lines w0.254: 0,0 80.01,0 80.01,33.401 0,33.401 0,0 ; 0,40.219 80.01,40.219 80.01,73.62 0,73.62 0,40.219 ; 0.254,123.444 0.254,156.845 80.264,156.845 80.264,123.444 0.254,123.444 ; 0.254,163.663 0.254,197.064 80.264,197.064 80.264,163.663 0.254,163.663

## Other copper
Top Layer:
  rectangle: 9.525,64.095 11.557,66
  rectangle: 8.128,62.444 10.541,64.349
  rectangle: 7.239,60.666 10.16,62.698
  rectangle: 10.414,63.841 12.573,67.016
  rectangle: 12.319,63.968 20.066,68.286
  rectangle: 45.72,55.84 47.752,57.745
  rectangle: 45.847,57.364 49.276,58.888
  rectangle: 50.038,60.412 51.562,61.555
  rectangle: 50.165,61.174 53.34,63.079
  rectangle: 45.847,58.634 50.419,62.952
  rectangle: 39.497,57.491 41.783,59.777
  rectangle: 37.846,55.586 41.402,57.745
  rectangle: 41.021,55.586 46.101,63.333
  rectangle: 25.019,48.855 28.067,51.522
  rectangle: 9.525,41.616 11.557,45.68
  rectangle: 42.545,40.6 44.577,43.902
  rectangle: 34.925,40.6 36.957,44.791
  rectangle: 32.385,40.6 34.417,44.791
  rectangle: 19.685,40.6 21.717,45.553
  rectangle: 14.605,40.6 16.637,45.68
  rectangle: 28.321,52.665 33.02,56.602
  rectangle: 66.294,50.379 70.612,52.792
  rectangle: 64.897,52.411 72.136,54.189
  rectangle: 63.246,53.935 77.724,55.586
  rectangle: 61.214,55.332 78.105,57.872
  rectangle: 63.5,56.856 66.675,59.65
  rectangle: 62.865,60.031 65.151,63.206
  rectangle: 11.43,49.236 14.478,52.284
  rectangle: 26.162,60.539 29.21,62.952
  rectangle: 21.971,51.522 28.067,60.92
  rectangle: 20.193,48.855 25.59,59.904
  rectangle: 49.911,69.048 51.943,70.572
  rectangle: 69.342,12.319 77.724,12.954
  rectangle: 32.131,8.89 34.798,9.525
  rectangle: 31.496,9.398 35.052,10.541
  rectangle: 15.748,24.13 27.686,28.194
  rectangle: 8.128,19.685 15.284,23.368
  rectangle: 6.858,20.447 8.382,22.479
  rectangle: 7.493,22.225 8.509,23.114
  rectangle: 7.62,19.685 8.636,20.574
  rectangle: 14.351,18.415 15.113,19.812
  rectangle: 13.716,18.923 14.732,19.812
  rectangle: 11.303,23.241 15.748,23.876
  rectangle: 13.462,23.647 15.9,26.035
  rectangle: 15.24,25.654 16.002,27.686
  rectangle: 14.478,25.781 15.367,27.051
  rectangle: 13.97,25.781 14.478,26.416
  rectangle: 12.7,23.749 13.716,25.4
  rectangle: 11.938,23.749 12.7,24.638
  rectangle: 17.335,16.764 19.304,21.78
  rectangle: 18.542,21.209 22.86,21.971
  rectangle: 4.953,0.762 14.478,8.001
  rectangle: 27.559,0.762 35.306,5.461
  rectangle: 0.635,5.08 8.763,14.732
  rectangle: 8.509,7.366 13.843,10.16
  rectangle: 8.509,10.16 11.684,12.446
  rectangle: 8.509,12.319 10.287,14.097
  rectangle: 10.16,12.192 11.303,13.335
  rectangle: 11.557,10.033 12.446,12.065
  rectangle: 12.446,10.033 13.716,10.795
  rectangle: 12.192,10.668 13.208,11.303
  rectangle: 10.287,10.033 14.605,14.351
  rectangle: 14.351,11.811 16.764,14.224
  rectangle: 16.51,13.208 18.161,14.224
  rectangle: 16.51,12.446 17.526,13.208
  rectangle: 14.605,10.287 15.494,11.811
  rectangle: 15.24,11.049 16.129,11.938
  rectangle: 20.701,18.161 23.114,19.431
  rectangle: 20.955,18.923 23.368,19.939
  rectangle: 22.987,16.002 25.273,17.399
  rectangle: 21.844,12.827 23.495,17.399
  rectangle: 16.002,2.413 18.542,8.255
  rectangle: 16.256,6.223 18.542,8.763
  rectangle: 16.764,8.001 19.558,9.271
  rectangle: 19.304,9.906 21.082,11.684
  rectangle: 21.463,10.414 23.495,13.716
  rectangle: 20.193,10.414 22.098,12.7
  rectangle: 20.955,12.319 21.717,13.335
  rectangle: 19.685,11.049 20.574,12.065
  rectangle: 18.288,9.017 20.701,10.922
  rectangle: 17.526,8.763 18.923,10.16
  rectangle: 17.145,9.017 18.034,9.525
  rectangle: 19.113,10.287 20.066,11.367
  rectangle: 22.352,6.604 27.559,8.255
  rectangle: 23.241,8.255 27.178,8.763
  rectangle: 23.495,8.636 26.924,9.017
  rectangle: 24.003,8.89 26.416,9.525
  rectangle: 24.511,9.144 26.162,10.033
  rectangle: 26.797,1.143 27.813,4.699
  rectangle: 26.035,1.143 26.797,4.064
  rectangle: 25.4,2.032 26.162,3.429
  rectangle: 16.002,1.016 26.67,2.54
  rectangle: 16.129,2.667 17.907,4.826
  rectangle: 19.304,8.636 19.812,9.271
  rectangle: 18.415,7.62 18.796,8.255
  rectangle: 21.59,4.191 26.924,5.08
  rectangle: 57.468,11.747 63.627,12.827
  rectangle: 63.232,7.366 63.881,10.781
  rectangle: 58.039,6.477 63.119,7.366
  rectangle: 60.452,6.985 63.373,8.255
  rectangle: 61.087,7.747 63.881,9.144
  rectangle: 61.849,8.89 63.627,9.779
  rectangle: 62.484,9.525 63.246,10.287
  rectangle: 41.052,0.731 43.307,6.985
  rectangle: 42.926,0.731 44.45,2.413
  rectangle: 39.243,2.54 43.053,7.493
  rectangle: 39.624,1.778 41.275,2.794
  rectangle: 40.386,1.016 41.529,1.905
  rectangle: 38.1,6.35 41.402,9.017
  rectangle: 41.148,7.239 42.164,8.509
  rectangle: 41.91,7.239 42.418,7.874
  rectangle: 38.862,5.715 39.624,6.477
  rectangle: 36.703,7.62 38.354,8.509
  rectangle: 37.465,6.985 38.354,7.747
  rectangle: 39.116,8.636 40.386,10.16
  rectangle: 40.259,8.763 40.894,9.398
  rectangle: 38.798,8.763 39.497,9.461
  rectangle: 52.832,1.016 64.77,3.937
  rectangle: 52.197,0.762 53.213,1.651
  rectangle: 53.213,4.191 54.356,5.461
  rectangle: 54.229,3.937 54.864,4.699
  rectangle: 64.516,1.524 65.659,2.667
  rectangle: 64.389,2.54 65.977,4.572
  rectangle: 64.643,4.318 65.977,5.08
  rectangle: 65.024,4.953 66.294,14.859
  rectangle: 66.294,13.335 66.802,14.859
  rectangle: 66.802,14.097 67.437,14.859
  rectangle: 63.881,13.97 64.897,14.859
  rectangle: 64.643,13.716 64.897,13.97
  rectangle: 68.072,6.35 78.867,12.573
  rectangle: 66.167,14.986 78.867,21.59
  rectangle: 66.294,20.828 70.358,22.987
  rectangle: 59.436,14.605 64.389,16.129
  rectangle: 57.531,5.334 63.119,7.366
  rectangle: 18.034,2.286 26.416,4.064
  rectangle: 53.213,3.81 55.372,4.445
  rectangle: 56.388,7.366 63.119,12.7
  rectangle: 53.594,8.128 56.769,10.16
  rectangle: 53.848,9.906 56.642,10.668
  rectangle: 54.356,10.668 56.642,11.303
  rectangle: 55.245,11.303 56.642,12.065
  rectangle: 55.753,11.811 57.023,12.573
  rectangle: 36.576,16.891 37.338,17.399
  rectangle: 22.225,29.337 24.257,33.02
  rectangle: 24.765,29.337 26.797,33.02
  rectangle: 27.305,29.337 29.337,33.02
  rectangle: 29.845,29.337 31.877,33.02
  rectangle: 37.465,29.337 39.497,33.02
  rectangle: 40.132,29.337 42.164,33.02
  rectangle: 45.085,29.845 47.117,33.02
  rectangle: 12.065,27.94 14.097,33.02
  rectangle: 6.985,27.94 9.017,32.004
  rectangle: 17.145,28.194 19.177,33.02
  rectangle: 67.056,27.94 73.279,29.21
  rectangle: 66.548,28.702 69.596,32.512
  rectangle: 69.469,29.083 72.39,29.845
  rectangle: 69.469,29.591 72.009,30.353
  rectangle: 69.215,30.226 71.374,30.861
  rectangle: 69.342,30.734 70.358,32.004
  rectangle: 70.104,30.734 70.866,31.242
  rectangle: 63.5,31.496 66.294,32.385
  rectangle: 64.262,30.861 66.802,31.496
  rectangle: 64.897,30.226 66.421,30.988
  rectangle: 66.04,28.956 67.183,30.099
  rectangle: 46.609,30.099 55.118,32.639
  rectangle: 52.451,29.591 54.737,30.226
  rectangle: 54.991,30.48 56.007,32.385
  rectangle: 55.753,31.242 56.642,32.385
  rectangle: 56.642,31.75 57.023,32.385
  rectangle: 36.068,0.508 37.973,3.81
  rectangle: 35.941,10.795 37.465,13.716
  rectangle: 73.025,22.924 75.501,24.511
  rectangle: 70.739,25.4 72.517,26.289
  rectangle: 71.374,24.765 73.66,25.527
  rectangle: 72.009,23.805 74.128,24.892
  rectangle: 72.136,24.892 74.128,25.908
  rectangle: 39.243,1.143 40.767,2.667
  rectangle: 39.624,0.762 40.767,1.27
  rectangle: 39.878,124.206 41.021,124.714
  rectangle: 39.497,124.587 41.021,126.111
  rectangle: 72.39,148.336 74.382,149.352
  rectangle: 72.263,147.249 74.382,148.336
  rectangle: 71.628,148.209 73.914,148.971
  rectangle: 70.993,148.844 72.771,149.733
  rectangle: 73.279,146.368 75.755,147.955
  rectangle: 36.195,134.239 37.719,137.16
  rectangle: 36.322,123.952 38.227,127.254
  rectangle: 56.896,155.194 57.277,155.829
  rectangle: 56.007,154.686 56.896,155.829
  rectangle: 55.245,153.924 56.261,155.829
  rectangle: 52.705,153.035 54.991,153.67
  rectangle: 46.863,153.543 55.372,156.083
  rectangle: 66.294,152.4 67.437,153.543
  rectangle: 65.151,153.67 66.675,154.432
  rectangle: 64.516,154.305 67.056,154.94
  rectangle: 63.754,154.94 66.548,155.829
  rectangle: 70.358,154.178 71.12,154.686
  rectangle: 69.596,154.178 70.612,155.448
  rectangle: 69.469,153.67 71.628,154.305
  rectangle: 69.723,153.035 72.263,153.797
  rectangle: 69.723,152.527 72.644,153.289
  rectangle: 66.802,152.146 69.85,155.956
  rectangle: 67.31,151.384 73.533,152.654
  rectangle: 17.399,151.638 19.431,156.464
  rectangle: 7.239,151.384 9.271,155.448
  rectangle: 12.319,151.384 14.351,156.464
  rectangle: 45.339,153.289 47.371,156.464
  rectangle: 40.386,152.781 42.418,156.464
  rectangle: 37.719,152.781 39.751,156.464
  rectangle: 30.099,152.781 32.131,156.464
  rectangle: 27.559,152.781 29.591,156.464
  rectangle: 25.019,152.781 27.051,156.464
  rectangle: 22.479,152.781 24.511,156.464
  rectangle: 36.83,140.335 37.592,140.843
  rectangle: 56.007,135.255 57.277,136.017
  rectangle: 55.499,134.747 56.896,135.509
  rectangle: 54.61,134.112 56.896,134.747
  rectangle: 54.102,133.35 56.896,134.112
  rectangle: 53.848,131.572 57.023,133.604
  rectangle: 56.642,130.81 63.373,136.144
  rectangle: 53.467,127.254 55.626,127.889
  rectangle: 18.288,125.73 26.67,127.508
  rectangle: 57.785,128.778 63.373,130.81
  rectangle: 59.69,138.049 64.643,139.573
  rectangle: 66.548,144.272 70.612,146.431
  rectangle: 66.421,138.43 79.121,145.034
  rectangle: 68.326,129.794 79.121,136.017
  rectangle: 64.897,137.16 65.151,137.414
  rectangle: 64.135,137.414 65.151,138.303
  rectangle: 67.056,137.541 67.691,138.303
  rectangle: 66.548,136.779 67.056,138.303
  rectangle: 65.278,128.397 66.548,138.303
  rectangle: 64.897,127.762 66.23,128.524
  rectangle: 64.643,125.984 66.23,128.016
  rectangle: 64.77,124.968 65.913,126.111
  rectangle: 54.483,127.381 55.118,128.143
  rectangle: 53.467,127.635 54.61,128.905
  rectangle: 52.451,124.206 53.467,125.095
  rectangle: 53.086,124.46 65.024,127.381
  rectangle: 39.052,132.207 39.751,132.905
  rectangle: 40.513,132.207 41.148,132.842
  rectangle: 39.37,132.08 40.64,133.604
  rectangle: 37.719,130.429 38.608,131.191
  rectangle: 36.957,131.064 38.608,131.953
  rectangle: 39.116,129.159 39.878,129.921
  rectangle: 42.164,130.683 42.672,131.318
  rectangle: 41.402,130.683 42.418,131.953
  rectangle: 38.354,129.794 41.656,132.461
  rectangle: 40.64,124.46 41.783,125.349
  rectangle: 39.878,125.222 41.529,126.238
  rectangle: 39.497,125.984 43.307,130.937
  rectangle: 43.18,124.175 44.704,125.857
  rectangle: 41.306,124.175 43.561,130.429
  rectangle: 62.738,132.969 63.5,133.731
  rectangle: 62.103,132.334 63.881,133.223
  rectangle: 61.341,131.191 64.135,132.588
  rectangle: 60.706,130.429 63.627,131.699
  rectangle: 58.293,129.921 63.373,130.81
  rectangle: 63.486,130.81 64.135,134.225
  rectangle: 57.721,135.191 63.881,136.271
  rectangle: 21.844,127.635 27.178,128.524
  rectangle: 18.669,131.064 19.05,131.699
  rectangle: 19.558,132.08 20.066,132.715
  rectangle: 16.383,126.111 18.161,128.27
  rectangle: 16.256,124.46 26.924,125.984
  rectangle: 25.654,125.476 26.416,126.873
  rectangle: 26.289,124.587 27.051,127.508
  rectangle: 27.051,124.587 28.067,128.143
  rectangle: 24.765,132.588 26.416,133.477
  rectangle: 24.257,132.334 26.67,132.969
  rectangle: 23.749,132.08 27.178,132.461
  rectangle: 23.495,131.699 27.432,132.207
  rectangle: 22.606,130.048 27.813,131.699
  rectangle: 19.367,133.731 20.32,134.81
  rectangle: 17.399,132.461 18.288,132.969
  rectangle: 17.78,132.207 19.177,133.604
  rectangle: 18.542,132.461 20.955,134.366
  rectangle: 19.939,134.493 20.828,135.509
  rectangle: 21.209,135.763 21.971,136.779
  rectangle: 20.447,133.858 22.352,136.144
  rectangle: 21.717,133.858 23.749,137.16
  rectangle: 19.558,133.35 21.336,135.128
  rectangle: 17.018,131.445 19.812,132.715
  rectangle: 16.51,129.667 18.796,132.207
  rectangle: 16.256,125.857 18.796,131.699
  rectangle: 22.098,136.271 23.749,140.843
  rectangle: 23.241,139.446 25.527,140.843
  rectangle: 21.209,142.367 23.622,143.383
  rectangle: 20.955,141.605 23.368,142.875
  rectangle: 15.494,134.493 16.383,135.382
  rectangle: 14.859,133.731 15.748,135.255
  rectangle: 16.764,135.89 17.78,136.652
  rectangle: 16.764,136.652 18.415,137.668
  rectangle: 14.605,135.255 17.018,137.668
  rectangle: 10.541,133.477 14.859,137.795
  rectangle: 12.446,134.112 13.462,134.747
  rectangle: 12.7,133.477 13.97,134.239
  rectangle: 11.811,133.477 12.7,135.509
  rectangle: 10.414,135.636 11.557,136.779
  rectangle: 8.763,135.763 10.541,137.541
  rectangle: 8.763,133.604 11.938,135.89
  rectangle: 8.763,130.81 14.097,133.604
  rectangle: 0.889,128.524 9.017,138.176
  rectangle: 27.813,124.206 35.56,128.905
  rectangle: 5.207,124.206 14.732,131.445
  rectangle: 18.796,144.653 23.114,145.415
  rectangle: 17.59,140.208 19.558,145.225
  rectangle: 12.192,147.193 12.954,148.082
  rectangle: 12.954,147.193 13.97,148.844
  rectangle: 14.224,149.225 14.732,149.86
  rectangle: 14.732,149.225 15.621,150.495
  rectangle: 15.494,149.098 16.256,151.13
  rectangle: 13.716,147.091 16.154,149.479
  rectangle: 11.557,146.685 16.002,147.32
  rectangle: 13.97,142.367 14.986,143.256
  rectangle: 14.605,141.859 15.367,143.256
  rectangle: 7.874,143.129 8.89,144.018
  rectangle: 7.747,145.669 8.763,146.558
  rectangle: 7.112,143.891 8.636,145.923
  rectangle: 8.382,143.129 15.538,146.812
  rectangle: 16.002,147.574 27.94,151.638
  rectangle: 31.75,132.842 35.306,133.985
  rectangle: 32.385,132.334 35.052,132.969
  rectangle: 69.596,135.763 77.978,136.398
  rectangle: 50.165,192.492 52.197,194.016
  rectangle: 20.447,172.299 25.845,183.348
  rectangle: 22.225,174.966 28.321,184.364
  rectangle: 26.416,183.983 29.464,186.396
  rectangle: 11.684,172.68 14.732,175.728
  rectangle: 63.119,183.475 65.405,186.65
  rectangle: 63.754,180.3 66.929,183.094
  rectangle: 61.468,178.776 78.359,181.316
  rectangle: 63.5,177.379 77.978,179.03
  rectangle: 65.151,175.855 72.39,177.633
  rectangle: 66.548,173.823 70.866,176.236
  rectangle: 28.575,176.109 33.274,180.046
  rectangle: 14.859,164.044 16.891,169.124
  rectangle: 19.939,164.044 21.971,168.997
  rectangle: 32.639,164.044 34.671,168.235
  rectangle: 35.179,164.044 37.211,168.235
  rectangle: 42.799,164.044 44.831,167.346
  rectangle: 9.779,165.06 11.811,169.124
  rectangle: 25.273,172.299 28.321,174.966
  rectangle: 41.275,179.03 46.355,186.777
  rectangle: 38.1,179.03 41.656,181.189
  rectangle: 39.751,180.935 42.037,183.221
  rectangle: 46.101,182.078 50.673,186.396
  rectangle: 50.419,184.618 53.594,186.523
  rectangle: 50.292,183.856 51.816,184.999
  rectangle: 46.101,180.808 49.53,182.332
  rectangle: 45.974,179.284 48.006,181.189
  rectangle: 12.573,187.412 20.32,191.73
  rectangle: 10.668,187.285 12.827,190.46
  rectangle: 7.493,184.11 10.414,186.142
  rectangle: 8.382,185.888 10.795,187.793
  rectangle: 9.779,187.539 11.811,189.444
  text "V1.0" at 75.184,124.841 h4
  text "V1.0" at 74.93,1.397 h4

## Silkscreen, mask and mechanical layers (free items; w line width, h text height)
Top Overlay:
  lines w0.254: 0,33.362 0,40.386 ; 0,43.648 0.001,43.647 ; 0.254,156.806 0.254,163.83 ; 0.254,167.092 0.255,167.091